# Altium PCB PCB1.PcbDoc
Units mm, origin at the board's own origin, x right, y up, seen from the top; angles counter-clockwise.
Board outline 152.4 x 101.6 mm, 2 copper layers (Top Layer, Bottom Layer); 4 components, 30 nets, 48 pads, 0 vias.
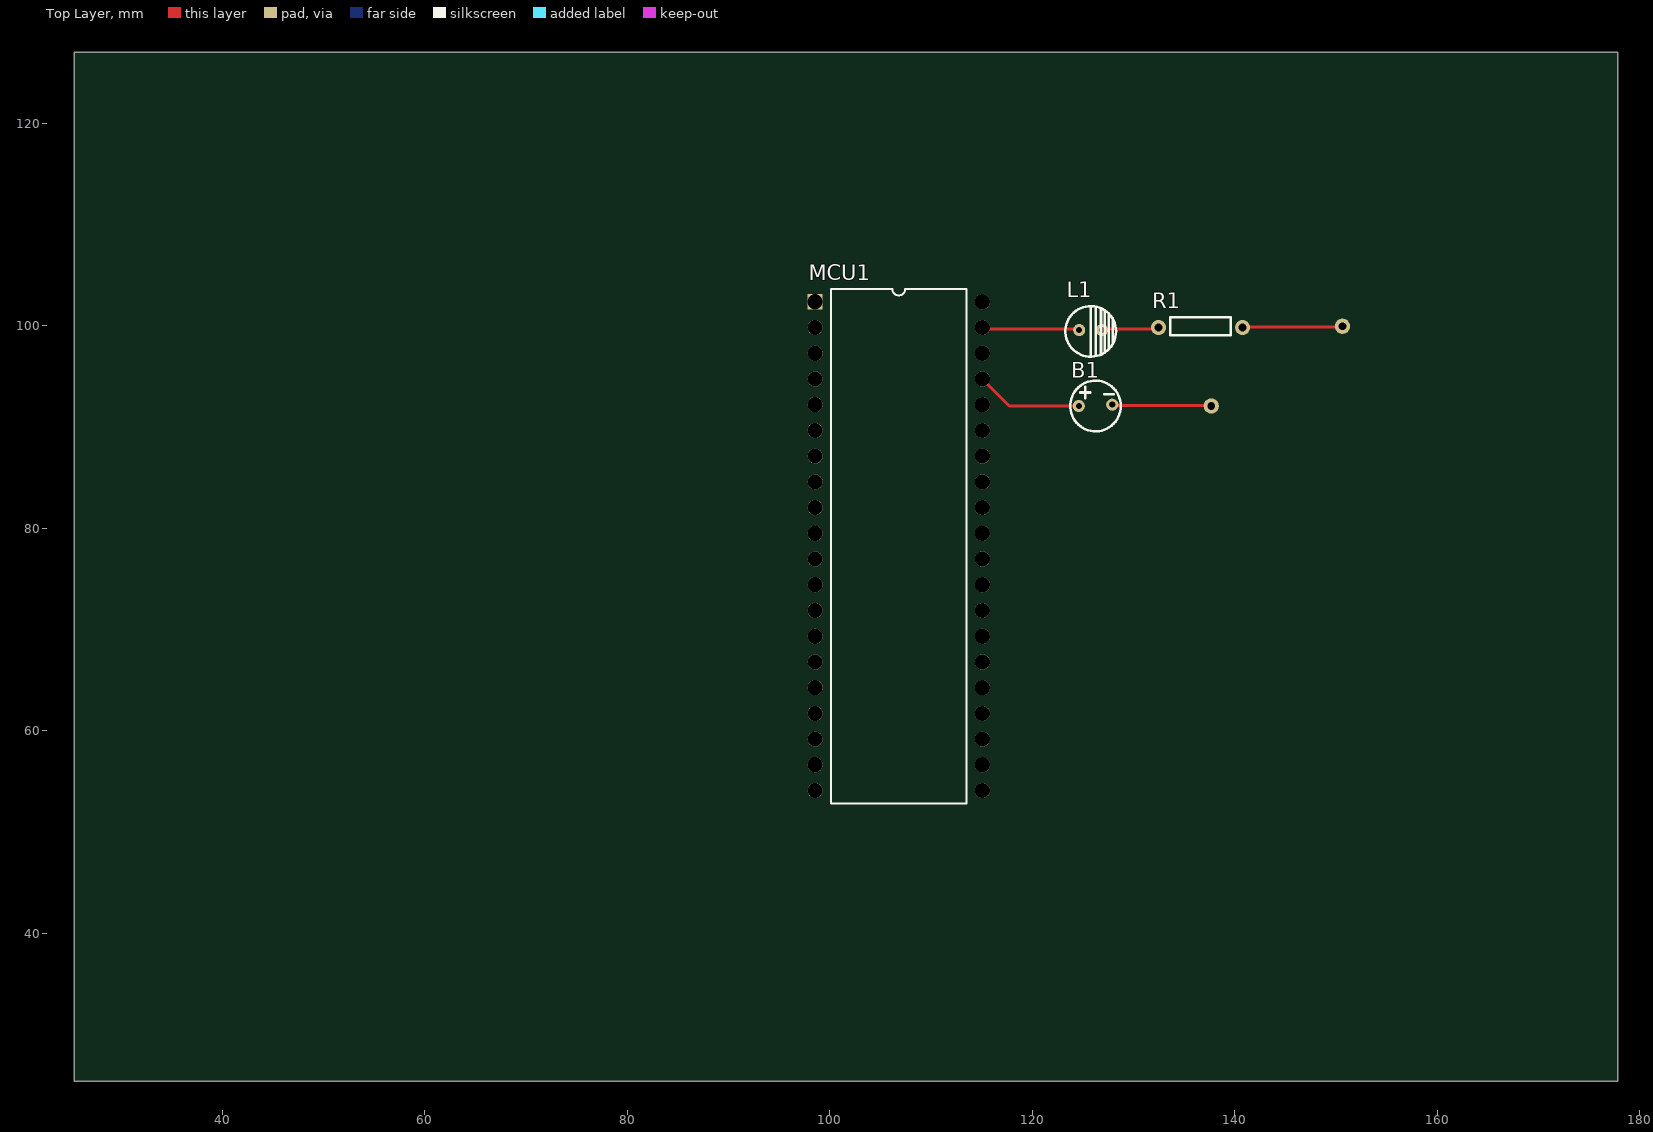
[diagram p0: Top Layer view]
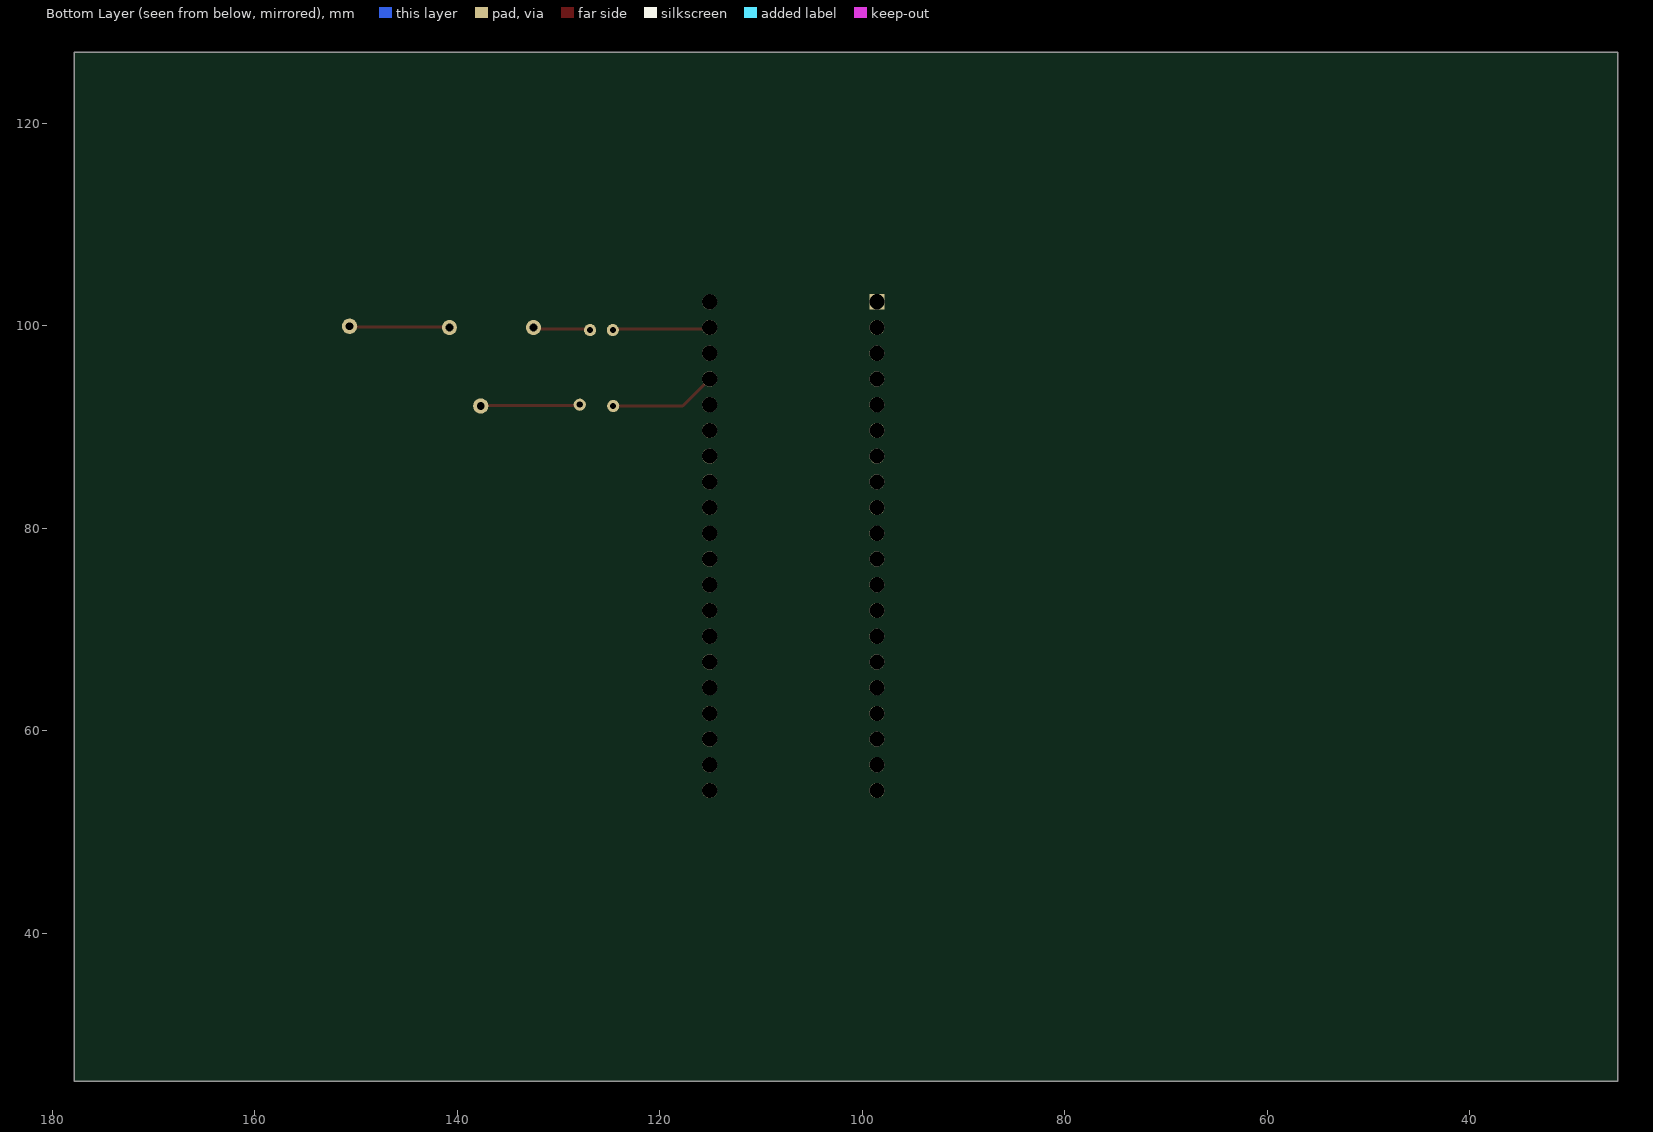
[diagram p1: Bottom Layer view, seen from below]

## Layer stack, top to bottom
Top Solder: solder mask 0.0102, Solder Resist, Dk 3.5
Top Layer: signal copper 0.0356
Dielectric 1: dielectric 0.32, FR-4, Dk 4.8
Bottom Layer: signal copper 0.0356
Bottom Solder: solder mask 0.0102, Solder Resist, Dk 3.5

## Board outline
25.4,25.4 177.8,25.4 177.8,127 25.4,127

## Design rules (kind name [scope] priority, off if disabled: settings)
Clearance [All] p1: gap=0.254 ignorepadtopadclearanceinfootprint=FALSE
PolygonConnect [All] p1: connectstyle=Relief reliefconductorwidth=0.254 reliefentries=4 polygonreliefangle="90 Angle" airgapwidth=0.254
RoutingVias [All] p1: holewidth=0.711 width=1.27 viastyle="Through Hole" minholewidth=0.711 minwidth=1.27 maxholewidth=0.711 maxwidth=1.27
SolderMaskExpansion [All] p1: expansion=0.102 istentingtop=FALSE
SupplyNets "Schematic Supply Nets_1" [InNet('VCC')] p1: voltage=0.000
SupplyNets "Schematic Supply Nets" [InNet('GND')] p2: voltage=0.000
Width [All] p1: maxlimit=0.3 minlimit=0.254 preferedwidth=0.254
30 further rules are at their usual default settings.

## Classes and differential pairs
component class Sheet1: L1 R1

## Components (designator, comment, footprint, x,y, rotation, side; value= is the part's Value field where it differs from the comment)
B1 "Comment" BUZZER 122.174,92.075 r0 top
L1 "LED" LED 124.623,99.568 r0 top
MCU1 "STC12C5A32S2" STC_DIP40 98.552,102.362 r0 top
R1 "RESISTOR" RESISTOR 132.461,99.822 r0 top

## Footprints (in the part's own frame and the unit in brackets; to place one, negate y for a bottom-side part, rotate by r counter-clockwise, add the part's x,y. Pads: shape width x height; smd on the part's side, far side on the other; paste and mask are expansions set on the pad)
BUZZER [mm]
  round 1.2 hole 0.6: 1(2.413,0) 2(5.715,0.127)
  silkscreen extent 1.57,-2.5 6.56,2.5
LED [mm]
  round 1.2 hole 0.6: 1(0,0) 2(2.25,0)
  silkscreen extent -1.35,-2.63 3.64,2.37
RESISTOR [mm]
  round 1.5 hole 0.8: 1(0,0) 2(8.3,0)
  silkscreen extent 1.14,-0.76 7.11,1.02
STC_DIP40 [mm]
  rect 1.5x1.5 hole 1.5: 1(0,0)
  round 1.5 hole 1.5: 2(0,-2.54) 3(0,-5.08) 4(0,-7.62) 5(0,-10.16) 6(0,-12.7) 7(0,-15.24) 8(0,-17.78) 9(0,-20.32) 10(0,-22.86) 11(0,-25.4) 12(0,-27.94) 13(0,-30.48) 14(0,-33.02) 15(0,-35.56) 16(0,-38.1) 17(0,-40.64) 18(0,-43.18) 19(0,-45.72) 20(0,-48.26) 21(16.51,-48.26) 22(16.51,-45.72) 23(16.51,-43.18) 24(16.51,-40.64) 25(16.51,-38.1) 26(16.51,-35.56) 27(16.51,-33.02) 28(16.51,-30.48) 29(16.51,-27.94) 30(16.51,-25.4) 31(16.51,-22.86) 32(16.51,-20.32) 33(16.51,-17.78) 34(16.51,-15.24) 35(16.51,-12.7) 36(16.51,-10.16) 37(16.51,-7.62) 38(16.51,-5.08) 39(16.51,-2.54) 40(16.51,0)
  silkscreen extent 1.58,-49.53 14.93,1.27

## Part data
B1: library part BUZZER

## Free pads (board coordinates)
  round 1.524 hole 0.762: GND(137.668,92.075) GND(150.622,99.949)

## Nets (pads, with @x,y where several pads share a name; then routed paths per layer and width w, separated by ;. In a path a pad name is that pad's centre, name@x,y a point inside that pad or via, vN(x,y) a via of type N, cw(c..) or ccw(c..) an arc to the next point about the centre after c; other vN are vias at no path point)
Beep: 
Buzzer1: B1.1 MCU1.37 | length 10.6
  Top Layer w0.3: MCU1.37 117.729,92.075 B1.1
GND: MCU1.20
GND1: B1.2 pad.GND@137.668,92.075 | length 9.8
  Top Layer w0.3: B1.2 127.953,92.138 137.605,92.138 pad.GND@137.668,92.075
GND2: pad.GND@150.622,99.949 R1.2 | length 9.9
  Top Layer w0.3: R1.2 140.825,99.885 150.558,99.885 pad.GND@150.622,99.949
H1: 
H2: 
H3: 
H4: 
H5: 
H6: 
H7: 
H8: 
IRIN: 
L1: 
L2: 
L3: 
L4: 
L5: 
L6: 
L7: 
L8: 
L9: 
L10: 
Net22pF_Capacitor: 
NetL1_1: L1.1 MCU1.39 | length 10.1
  Top Layer w0.3: MCU1.39@115.062,100.058 MCU1.39 ; MCU1.39@115.189,99.949 MCU1.39 ; L1.1 124.496,99.695 115.189,99.695 MCU1.39
NetL1_2: L1.2 R1.1 | length 5.7
  Top Layer w0.3: L1.2 127,99.695 132.334,99.695 R1.1
RXD: 
TXD: 
VCC: MCU1.40
pads on no net: MCU1.1 MCU1.2 MCU1.3 MCU1.4 MCU1.5 MCU1.6 MCU1.7 MCU1.8 MCU1.9 MCU1.10 MCU1.11 MCU1.12 MCU1.13 MCU1.14 MCU1.15 MCU1.16 MCU1.17 MCU1.18 MCU1.19 MCU1.21 MCU1.22 MCU1.23 MCU1.24 MCU1.25 MCU1.26 MCU1.27 MCU1.28 MCU1.29 MCU1.30 MCU1.31 MCU1.32 MCU1.33 MCU1.34 MCU1.35 MCU1.36 MCU1.38